# Altium PCB Vertigo Core.PcbDoc (part 2 of 2)
Units mm, origin at the board's own origin, x right, y up, seen from the top; angles counter-clockwise.
Board outline 68.33 x 88.9 mm, 4 copper layers (Power, Signal1, Signal 2, Ground); 94 components, 110 nets, 437 pads, 167 vias.
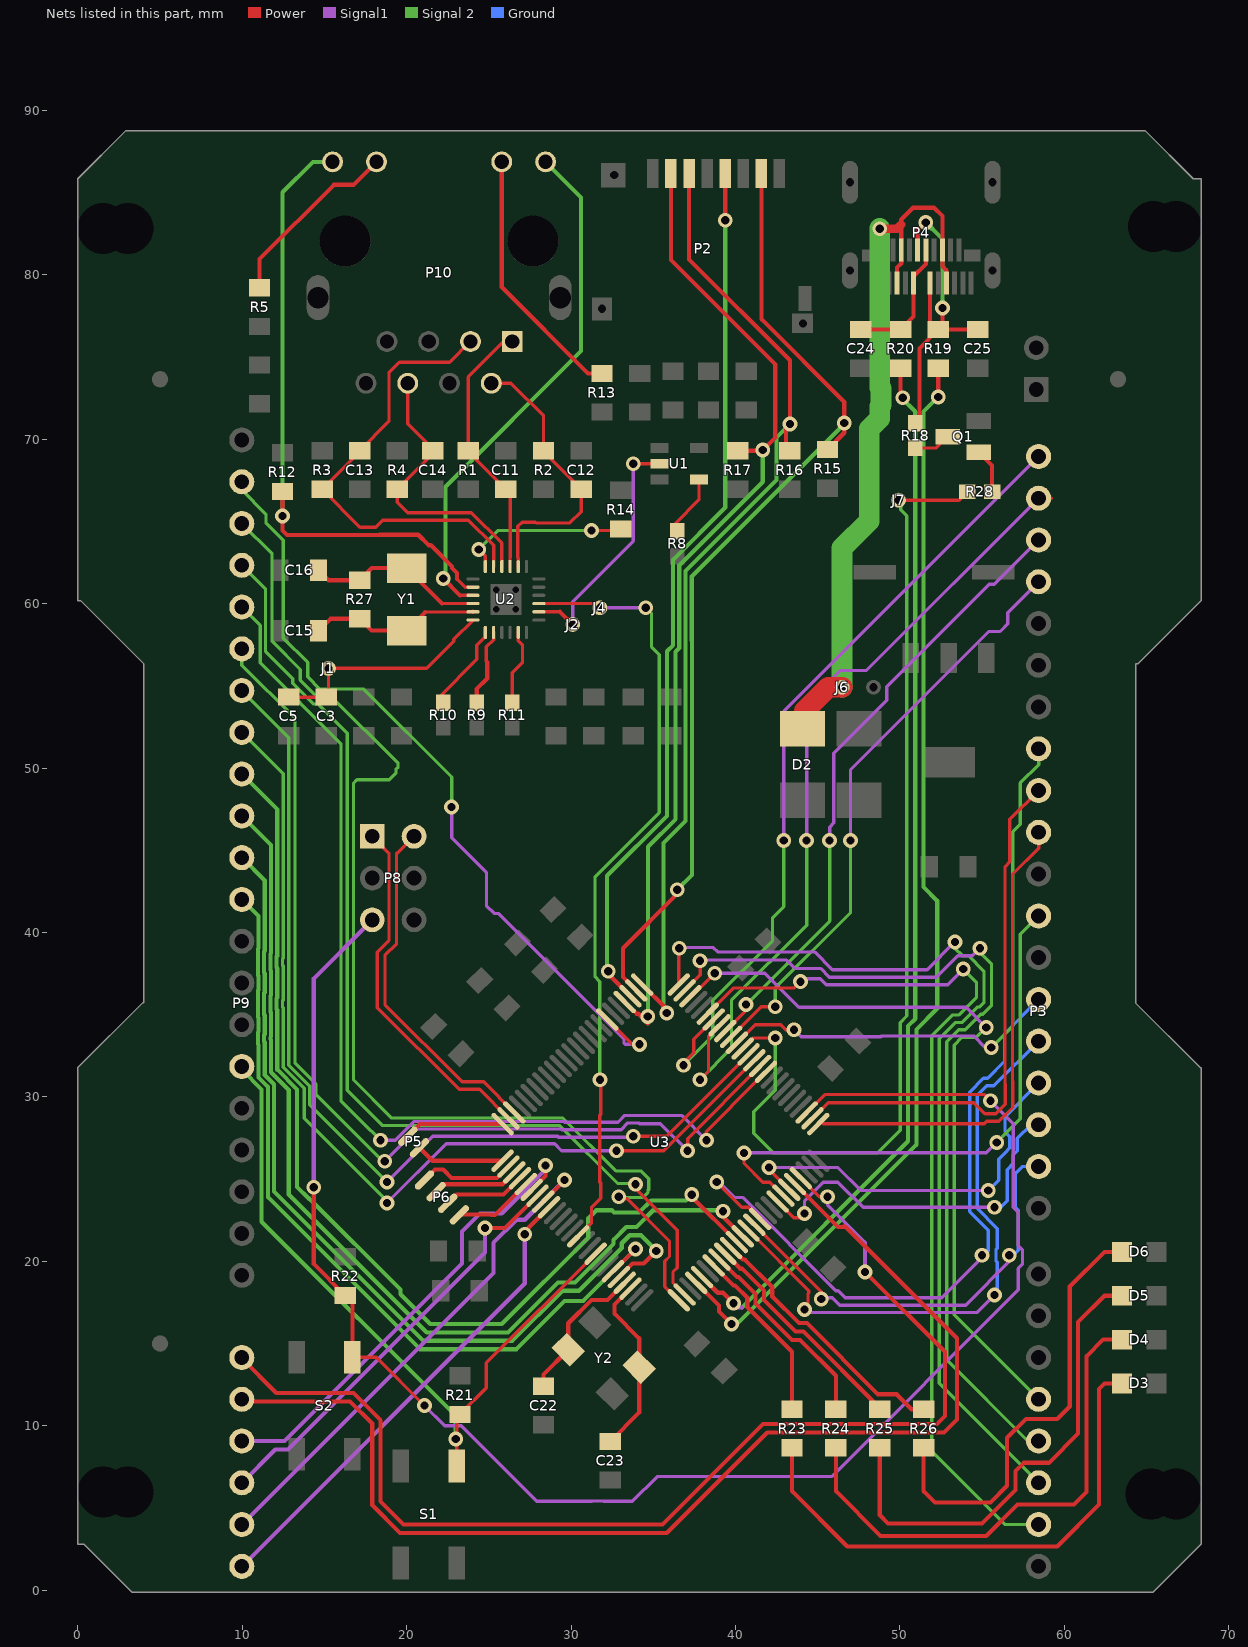
[diagram p4: the nets of this part, all layers, seen from the top]

## Via types
v1: diameter 0.9, hole 0.5, Power to Ground, tented both sides, 165 vias
v2: diameter 0.9, hole 0.5, Power to Ground, 2 vias

## Nets (pads, with @x,y where several pads share a name; then routed paths per layer and width w, separated by ;. In a path a pad name is that pad's centre, name@x,y a point inside that pad or via, vN(x,y) a via of type N, cw(c..) or ccw(c..) an arc to the next point about the centre after c; other vN are vias at no path point) (continued)
"ISP BOOT": P8.5 R22.1 S2.2 U3.53 | length 102.7
  Power w0.2: S2.2@16.7,14.166 18.146,14.166 v1(21.082,11.23) ; U3.53@44.325,29.053 44.366,29.053 45.466,30.153 55.118,30.153 v1(55.499,29.772)
  Power w0.254: v1(14.351,24.511) 14.351,19.834 R22.1@16.256,17.929 16.7,17.485 S2.2@16.7,14.166
  Signal1 w0.2: v1(21.082,11.23) 22.31,10.002 23.32,10.002 27.907,5.415 31.275,5.415 31.29,5.43 31.956,5.43 31.971,5.415 33.727,5.415 35.224,6.912 45.841,6.912 57.192,18.263 57.192,19.568 57.446,19.822 57.446,20.707 57.192,20.961 57.192,22.993 56.896,23.289 56.896,28.375 v1(55.499,29.772)
  Signal1 w0.254: v1(14.351,24.511) 14.351,37.211 P8.5@17.907,40.767
"JTAG RTCK": P5.1 U3.100 | length 6.1
  Power w0.254: P5.1@20.066,27.613 20.799,28.346 U3.100@25.834,28.346
"JTAG TCK": P6.4 U3.5 | length 4.8
  Power w0.254: P6.4@23.203,22.825 23.235,22.856 25.109,22.856 25.141,22.825 25.369,22.825 U3.5@27.248,24.704
"JTAG TD0": P5.2 U3.1 | length 5.4
  Power w0.254: P5.2@20.773,26.906 21.561,26.118 U3.1@25.834,26.118
"JTAG TDI": P6.1 U3.2 | length 5.9
  Power w0.254: P6.1@21.082,24.946 21.717,25.581 22.225,25.581 22.733,25.073 25.496,25.073 U3.2@26.188,25.765
"JTAG TMS": P6.2 U3.3 | length 4.6
  Power w0.254: P6.2@22.242,24.692 25.822,24.692 U3.3@26.541,25.411
"JTAG TRST": P6.3 U3.4 | length 5
  Power w0.254: P6.3@22.496,23.532 23.021,24.057 25.894,24.057 U3.4@26.895,25.058
LED1: R23.1 U3.32 | length 10.8
  Power w0.254: U3.32@38.668,19.754 39.884,18.538 39.968,18.538 40.709,17.797 40.709,17.229 43.434,14.504 R23.1@43.434,11.008
"LED1 REGOFF": P10.9 U2.3 | length 32.2
  Power w0.2: 23.245,60.502 U2.3@24.035,60.502
  Power w0.254: v1(22.225,61.522) 23.245,60.502
  Signal 2 w0.254: v1(22.225,61.522) 22.352,61.395 22.352,67.11 30.607,75.365 30.607,84.709 P10.9@28.448,86.868
LED2: R24.1 U3.33 | length 12.4
  Power w0.254: U3.33@39.022,20.108 40.083,19.046 40.179,19.046 41.217,18.008 41.217,17.439 43.431,15.225 43.916,15.225 46.101,13.04 R24.1@46.101,11.008
"LED2 NINTSEL": P10.12 R12.1 U2.2 | length 39.2
  Power w0.2: 23.056,61.501 23.555,61.002 U2.2@24.035,61.002
  Power w0.254: R12.1@12.446,66.824 v1(12.446,65.332) 12.446,64.443 12.718,64.171 18.314,64.171 18.332,64.189 20.701,64.189 21.336,63.554 21.463,63.554 22.758,62.259 22.758,62.164 23.056,61.866 23.056,61.501
  Signal 2 w0.254: v1(12.446,65.332) 12.446,85.017 14.297,86.868 P10.12@15.494,86.868
LED3: R25.1 U3.34 | length 13.7
  Power w0.254: U3.34@39.375,20.461 40.283,19.554 40.389,19.554 41.725,18.218 41.725,17.649 43.641,15.733 44.126,15.733 48.768,11.091 R25.1@48.768,11.008
LED4: R26.1 U3.35 | length 16.1
  Power w0.254: U3.35@39.729,20.815 40.436,20.107 40.554,20.107 42.233,18.428 42.233,17.86 43.852,16.241 44.337,16.241 48.664,11.914 49.803,11.914 50.709,11.008 R26.1@51.435,11.008
MISO1: P9.6 U3.61 | length 61.9
  Power w0.203: v1(37.084,26.724) 37.084,27.469 U3.61@41.496,31.881
  Signal1 w0.2: v1(18.669,26.089) 20.635,28.055 29.368,28.055 29.417,28.006 33.038,28.006 33.449,28.417 34.115,28.417 34.157,28.375 35.433,28.375 v1(37.084,26.724)
  Signal 2 w0.2: 18.081,26.553 18.546,26.089 v1(18.669,26.089)
  Signal 2 w0.203: P9.6@9.973,57.251 9.973,56.251 13.208,53.016 13.208,32.058 14.478,30.788 14.478,30.157 18.081,26.553
MOSI1: P9.5 U3.60 | length 62.7
  Power w0.203: v1(38.227,27.359) 38.227,27.867 39.751,29.391 39.751,29.429 U3.60@41.85,31.528
  Signal1 w0.2: v1(18.415,27.359) 19.297,27.359 20.447,28.509 29.556,28.509 29.605,28.46 32.85,28.46 33.261,28.871 36.715,28.871 v1(38.227,27.359)
  Signal 2 w0.2: 17.272,28.502 v1(18.415,27.359)
  Signal 2 w0.203: P9.5@9.973,59.791 11.091,58.673 11.091,56.4 16.002,51.489 16.002,29.772 17.272,28.502
NetC3_1: C3.1 C5.1 J1.1 U2.6 | length 14.2
  Power w0.203: C5.1@12.827,54.315 C3.1@15.113,54.315 15.24,54.442 J1.1@15.24,56.061 21.209,56.061 22.86,57.712 22.86,57.827 U2.6@24.035,59.002
NetC15_2: C15.2 R27.2 U2.5 Y1.1 | length 10.5
  Power w0.2: 21.132,59.494 U2.5@24.027,59.494
  Power w0.254: C15.2@14.637,58.347 15.367,59.077 R27.2@17.145,59.077 17.864,58.358 Y1.1@19.996,58.358 21.132,59.494 ; U2.5@24.027,59.494 U2.5@24.035,59.502
NetC16_2: C16.2 R27.1 U2.4 Y1.2 | length 10.8
  Power w0.2: 22.152,60.002 U2.4@24.035,60.002
  Power w0.254: C16.2@14.637,62.03 15.24,61.427 R27.1@17.145,61.427 17.876,62.158 Y1.2@19.996,62.158 22.152,60.002
NetC22_2: C22.2 U3.22 Y2.2 | length 9.2
  Power w0.254: C22.2@28.57,12.405 C22.2@28.321,12.405 28.321,13.121 Y2.2@29.825,14.625 29.825,16.236 31.242,17.653 32.218,17.653 U3.22@33.259,18.694
NetC23_2: C23.2 U3.23 Y2.1 | length 11
  Power w0.254: C23.2@32.385,9.049 34.138,10.802 Y2.1@34.138,13.564 34.138,15.319 32.639,16.818 32.639,17.367 U3.23@33.612,18.34
NetD3_1: D3.1 R23.2 | length 32.3
  Power w0.254: R23.2@43.434,8.658 43.434,6.023 46.79,2.667 59.563,2.667 62.103,5.207 62.103,12.246 62.43,12.573 D3.1@63.5,12.573
NetD4_1: D4.1 R24.2 | length 30.9
  Power w0.254: R24.2@46.101,8.658 46.101,6.023 48.822,3.302 55.245,3.302 57.15,5.207 60.579,5.207 61.341,5.969 61.341,14.224 62.357,15.24 D4.1@63.5,15.24
NetD5_1: D5.1 R25.2 | length 29.4
  Power w0.254: R25.2@48.768,8.658 48.768,4.572 49.276,4.064 54.991,4.064 57.023,6.096 57.023,7.239 57.531,7.747 59.055,7.747 60.833,9.525 60.833,16.31 62.43,17.907 D5.1@63.5,17.907
NetD6_1: D6.1 R26.2 | length 27.3
  Power w0.254: R26.2@51.435,8.658 51.435,6.023 52.124,5.334 55.499,5.334 56.515,6.35 56.515,9.271 57.658,10.414 59.563,10.414 60.325,11.176 60.325,18.469 62.43,20.574 D6.1@63.5,20.574
NetJ2_1: J2.1 U1.2 U2.14 | length 15.3
  Power w0.2: U2.14@28.035,59.502 29.325,59.502
  Power w0.203: v1(33.782,68.507) U1.2@35.376,68.507
  Power w0.254: 29.325,59.502 J2.1@30.099,58.728
  Signal1 w0.203: J2.1@30.099,58.728 30.099,60.125 33.782,63.808 v1(33.782,68.507)
NetP10_10: P10.10 R13.2 | length 15.9
  Power w0.254: P10.10@25.781,86.868 25.781,79.248 31.029,74 R13.2@31.877,74
NetP10_11: P10.11 R5.2 | length 11.3
  Power w0.254: R5.2@11.049,79.207 11.049,80.953 15.567,85.471 16.764,85.471 P10.11@18.161,86.868
NetQ1_1: Q1.3 R18.1 | length 2.3
  Power w0.2: R18.1@50.927,69.469 52.209,69.469 Q1.3@52.898,70.158
NetQ1_2: Q1.1 R28.2 | length 2.7
  Power w0.254: Q1.1@54.798,69.208 55.602,68.404 R28.2@55.602,66.802
NetR8_1: R8.1 U1.4 | length 3.4
  Power w0.203: R8.1@36.322,64.856 37.776,66.31 U1.4@37.776,67.557 ; R8.1@36.449,64.389 R8.1@36.449,64.516
NetR9_1: R9.1 U2.8 | length 4.7
  Power w0.203: 24.9,56.438 24.848,56.489 24.848,57.371 25.285,57.808 U2.8@25.285,58.252
  Power w0.254: R9.1@24.257,53.975 24.257,54.803 24.9,55.445 24.9,56.438
NetR10_1: R10.1 U2.7 | length 5.1
  Power w0.203: R10.1@21.971,54.315 24.264,56.608 24.264,57.473 24.785,57.994 U2.7@24.785,58.252
NetR11_1: R11.1 U2.11 | length 4.6
  Power w0.203: R11.1@26.416,53.975 26.416,55.799 27.044,56.427 27.044,57.473 26.785,57.732 U2.11@26.785,58.252
NetR14_2: R14.2 U2.24 | length 10.4
  Power w0.203: v1(24.384,63.3) 24.785,62.899 U2.24@24.785,62.252 ; v1(31.242,64.443) 32.925,64.443 R14.2@33.02,64.538
  Signal 2 w0.203: v1(24.384,63.3) 25.527,64.443 v1(31.242,64.443)
P1.22: P9.9 U3.36 | length 62.3
  Power w0.254: v1(37.338,24.057) 37.338,23.913 U3.36@40.082,21.169
  Signal 2 w0.254: P9.9@9.973,49.631 12.132,47.472 12.132,38.577 12.09,38.535 12.09,37.867 12.132,37.825 12.132,36.037 12.09,35.995 12.09,35.327 12.132,35.285 12.132,31.656 13.335,30.453 13.335,24.531 14.059,23.807 14.093,23.807 19.616,18.284 19.616,17.998 21.431,16.183 25.781,16.183 31.046,21.448 31.046,22.623 31.533,23.11 32.475,23.11 32.613,22.972 34.139,22.972 34.87,23.703 36.984,23.703 v1(37.338,24.057)
P1.23: P9.10 U3.37 | length 59.5
  Power w0.254: v1(39.243,23.041) 39.243,22.715 U3.37@40.436,21.522
  Signal 2 w0.254: P9.10@9.973,47.091 11.751,45.313 11.751,38.735 11.709,38.693 11.709,37.709 11.751,37.667 11.751,36.195 11.709,36.153 11.709,35.169 11.751,35.127 11.751,33.655 11.709,33.613 11.709,33.519 11.751,33.478 11.751,31.498 12.827,30.422 12.827,24.068 21.22,15.675 26.162,15.675 29.21,18.723 30.226,18.723 32.57,21.067 32.57,21.31 33.354,22.094 33.98,22.094 34.996,23.11 39.174,23.11 v1(39.243,23.041)
P1.30: P9.11 U3.21 | length 54.4
  Power w0.254: U3.21@32.905,19.047 33.724,19.866 34.417,19.866 v1(35.179,20.628)
  Signal 2 w0.254: P9.11@9.973,44.551 11.37,43.154 11.37,38.892 11.328,38.851 11.328,37.551 11.37,37.51 11.37,36.352 11.328,36.311 11.328,35.011 11.37,34.97 11.37,33.812 11.328,33.771 11.328,33.362 11.37,33.32 11.37,31.341 11.938,30.773 11.938,24.239 21.01,15.167 26.416,15.167 29.464,18.215 30.48,18.215 33.078,20.813 33.078,21.099 33.565,21.586 34.253,21.586 35.179,20.66 v1(35.179,20.628)
P1.31: P9.12 U3.20 | length 49.5
  Power w0.254: U3.20@32.552,19.401 33.906,20.755 v1(33.909,20.755)
  Signal 2 w0.254: P9.12@9.973,42.011 10.989,40.995 10.989,39.05 10.947,39.009 10.947,37.393 10.989,37.352 10.989,36.51 10.947,36.469 10.947,34.853 10.989,34.812 10.989,33.97 10.947,33.929 10.947,33.204 10.989,33.162 10.989,31.183 11.557,30.615 11.557,23.902 20.8,14.659 26.67,14.659 29.591,17.58 30.734,17.58 v1(33.909,20.755)
P2.6: P3.52 U3.67 | length 38
  Power w0.2: U3.67@39.375,34.003 40.64,35.267 v1(40.64,35.614)
  Signal1 w0.2: v1(45.72,45.593) 45.72,46.409 45.974,46.663 45.974,50.897 49.191,54.114 49.191,54.954 55.42,61.183 55.745,61.183 P3.52@58.433,63.871
  Signal 2 w0.2: v1(40.64,35.614) 45.72,40.694 v1(45.72,45.593)
P2.7: P3.51 U3.66 | length 36.3
  Power w0.2: U3.66@39.729,33.649 41.567,35.487 v1(42.418,35.487)
  Signal1 w0.2: v1(46.99,45.593) 46.99,49.888 55.407,58.305 56.086,58.305 56.557,58.776 56.557,59.455 P3.51@58.433,61.331
  Signal 2 w0.2: v1(42.418,35.487) 42.418,36.63 46.99,41.202 v1(46.99,45.593)
P2.9: J7.1 R28.1 U3.64 | length 61.5
  Power w0.2: U3.64@40.436,32.942 41.076,33.582 v1(42.418,33.582) ; J7.1@49.911,66.294 53.594,66.294 R28.1@54.102,66.802
  Signal 2 w0.2: v1(42.418,33.582) 42.418,30.407 41.106,29.095 41.106,27.782 42.291,26.597 48.641,26.597 50.012,27.968 50.012,34.514 50.419,34.921 50.419,65.332 50.038,65.713 J7.1@50.038,66.167
PLAY: P3.45 U3.51 | length 29.3
  Power w0.2: 45.339,28.375 55.132,28.375 55.271,28.514 56.02,28.514 56.863,29.357 56.863,30.962 56.842,30.983 56.842,43.538 58.433,45.129 P3.45@58.433,46.091
PLAY_LED: P9.2 U3.82 | length 49.1
  Power w0.2: U3.82@32.198,34.71 33.707,33.201 34.163,33.201 v1(34.163,33.197)
  Signal1 w0.2: v1(22.733,47.625) 22.733,45.768 24.85,43.651 24.85,41.631 25.321,41.16 25.57,41.16 33.22,33.51 33.22,33.261 33.28,33.201 34.163,33.201 v1(34.163,33.197)
  Signal 2 w0.2: P9.2@9.973,67.411 9.973,66.916 11.442,65.447 11.442,64.916 12.5,63.858 12.5,57.905 13.982,56.423 13.982,55.54 14.719,54.803 17.387,54.803 22.733,49.457 v1(22.733,47.625)
"POT SCI": P9.22 U3.47 | length 71
  Power w0.2: U3.47@43.971,25.058 45.099,23.93 v1(45.593,23.93)
  Power w0.254: P9.22@9.973,14.151 9.973,14.084 12.065,11.992 16.764,11.992 18.415,10.341 18.415,5.388 19.812,3.991 35.56,3.991 41.671,10.102 52.243,10.102 52.736,10.595 52.736,14.501 v1(47.879,19.358)
  Signal1 w0.2: v1(45.593,23.93) 45.593,23.422 47.879,21.136
  Signal1 w0.254: v1(47.879,19.358) 47.879,21.136
"POT SDA": P9.23 U3.46 | length 71.4
  Power w0.254: P9.23@9.973,11.611 10.1,11.484 16.554,11.484 17.907,10.131 17.907,5.178 19.602,3.483 35.814,3.483 41.925,9.594 52.676,9.594 53.467,10.385 53.467,15.326 46.699,22.094 46.667,22.094 ; U3.46@43.618,24.704 46.228,22.094 46.667,22.094 ; 46.609,22.152 46.667,22.094
PWM0: P3.54 U3.69 | length 49.9
  Power w0.2: v1(36.83,31.931) 36.83,32.058 37.465,32.693 37.465,33.507 U3.69@38.668,34.71
  Signal1 w0.2: v1(42.926,45.593) 42.926,53.444 P3.54@58.433,68.951 P3.54@58.864,68.951
  Signal 2 w0.2: v1(36.83,31.931) 38.608,33.709 38.608,35.868 42.249,39.509 42.249,40.9 42.926,41.577 v1(42.926,45.593)
PWM1: P3.53 U3.68 | length 49.4
  Power w0.2: v1(37.846,31.042) 38.354,31.55 38.354,33.689 U3.68@39.022,34.356 ; P3.53@58.433,66.411 59.204,66.411
  Signal1 w0.2: v1(44.323,45.593) 44.323,53.896 46.361,55.934 47.956,55.934 P3.53@58.433,66.411
  Signal 2 w0.2: v1(37.846,31.042) 39.751,32.947 39.751,35.868 44.323,40.44 v1(44.323,45.593)
RESET: P9.16 R21.1 S1.2 U3.17 | length 44.6
  Power w0.203: S1.2@23.05,7.562 23.05,10.499 R21.1@23.241,10.69 24.848,12.297 24.848,13.819 U3.17@31.491,20.461
  Signal1 w0.254: P9.16@9.973,31.851 P9.16@10.053,31.931
  Signal 2 w0.254: P9.16@9.973,31.851 9.973,31.66 11.176,30.457 11.176,22.406 22.987,10.595 v1(22.987,9.198)
RSTOUT: J4.1 U2.15 U3.14 | length 47.5
  Power w0.2: U2.15@28.035,60.002 J4.1@31.492,60.002
  Power w0.203: U3.14@30.43,21.522 31.242,22.334 31.242,23.295 31.794,23.847 31.794,24.772 31.75,24.815 31.75,28.887 31.794,28.93 31.794,30.998 v1(31.75,31.042)
  Power w0.254: J4.1@31.492,60.002 J4.1@31.75,59.744
  Signal1 w0.203: J4.1@31.75,59.744 v1(34.544,59.744)
  Signal 2 w0.203: v1(31.75,31.042) 31.75,37.015 31.452,37.312 31.452,43.397 35.35,47.294 35.35,56.903 34.892,57.36 34.892,59.396 v1(34.544,59.744)
RX0: P8.1 U3.99 | length 21.9
  Power w0.203: P8.1@17.907,45.847 18.923,44.831 18.923,39.509 18.219,38.804 18.219,35.429 23.19,30.458 24.429,30.458 U3.99@26.188,28.699
RX+: C13.1 P10.3 R3.1 U2.23 | length 28
  Power w0.203: P10.3@23.876,75.946 22.606,74.676 19.558,74.676 18.923,74.041 18.923,71.079 C13.1@17.145,69.301 17.145,69.237 R3.1@14.859,66.951 17.157,64.653 18.114,64.653 18.538,65.078 23.749,65.078 25.285,63.542 U2.23@25.285,62.252
RX-: C14.1 P10.6 R4.1 U2.22 | length 17.6
  Power w0.203: P10.6@20.066,73.406 20.066,70.937 21.59,69.413 C14.1@21.59,69.301 21.59,69.11 R4.1@19.431,66.951 19.431,66.17 20.066,65.535 23.938,65.535 25.785,63.689 U2.22@25.785,62.252
SCK1: P9.8 U3.62 | length 58.6
  Power w0.203: v1(32.766,26.724) 35.632,26.724 U3.62@41.143,32.235
  Signal1 w0.2: v1(18.796,23.549) 22.394,27.147 28.991,27.147 29.414,26.724 v1(32.766,26.724)
  Signal 2 w0.2: 18.462,24.013 18.796,23.68 v1(18.796,23.549)
  Signal 2 w0.203: P9.8@9.973,52.171 12.488,49.656 12.488,38.429 12.446,38.388 12.446,38.014 12.488,37.973 12.488,35.889 12.446,35.848 12.446,35.474 12.488,35.433 12.488,31.803 13.767,30.524 13.767,28.709 18.462,24.013
"SD CD": P3.46 U3.52 | length 32.6
  Power w0.2: U3.52@44.678,28.699 45.624,29.645 54.489,29.645 55.166,28.968 55.832,28.968 56.409,29.545 56.409,30.774 56.388,30.795 56.388,44.002 56.684,44.298 56.684,46.882 P3.46@58.433,48.631
"SD CS": P2.2 R17.1 U3.79 | length 61.8
  Power w0.254: U3.79@33.259,35.77 33.966,35.063 34.079,35.063 34.66,34.482 v1(34.66,34.894) ; P2.2@36.072,86.16 36.072,80.895 42.418,74.549 42.418,70.104 v1(41.656,69.342) 41.615,69.301 R17.1@40.132,69.301
  Signal 2 w0.254: v1(34.66,34.894) 34.66,34.482 34.671,34.471 34.671,45.215 36.34,46.884 36.34,57.072 36.576,57.308 36.576,62.328 41.656,67.408 v1(41.656,69.342)
"SD IRQ": P9.4 U3.27 | length 62.8
  Power w0.2: v1(33.909,24.692) 33.909,24.438 36.449,21.898 36.449,19.612 36.195,19.358 36.195,18.692 U3.27@36.9,17.987
  Signal 2 w0.2: P9.4@9.973,62.331 11.419,60.885 11.419,57.088 13.074,55.433 13.074,55.164 14.343,53.895 14.612,53.895 16.383,52.124 16.383,30.407 18.53,28.26 29.318,28.26 32.844,24.734 33.867,24.734 v1(33.909,24.692)
"SD MISO": P2.7 R15.1 U3.77 | length 59.8
  Power w0.254: U3.77@33.966,36.477 33.147,37.296 33.147,39.043 36.449,42.345 v1(36.449,42.599) ; P2.7@41.572,86.16 41.572,77.3 46.609,72.263 v1(46.609,70.993) 46.609,70.39 R15.1@45.593,69.374
  Signal 2 w0.254: v1(36.449,42.599) 37.356,43.506 37.356,57.734 37.338,57.752 37.338,61.653 46.609,70.924 v1(46.609,70.993) v1@46.609,71.047
"SD MOSI": P2.3 R16.1 U3.76 | length 61
  Power w0.254: U3.76@34.319,36.831 35.814,35.336 v1(35.814,35.106) ; P2.3@37.172,86.16 37.172,80.938 43.307,74.803 v1(43.307,70.92) 43.307,70.907 43.066,70.666 43.066,69.542 R16.1@43.307,69.301
  Signal1 w0.254: v1@35.618,35.302 v1(35.814,35.106)
  Signal 2 w0.254: v1@35.618,35.302 35.618,45.443 36.957,46.782 36.957,61.99 42.487,67.52 42.487,70.1 v1(43.307,70.92)
"SD SCK": P2.5 U3.78 | length 53.7
  Power w0.254: v1(32.258,37.646) 32.258,37.478 U3.78@33.612,36.124 ; P2.5@39.37,86.162 P2.5@39.372,86.16 v1(39.372,83.314)
  Signal1 w0.254: v1@32.131,37.646 v1(32.258,37.646)
  Signal 2 w0.254: v1(32.258,37.646) 32.189,37.715 32.189,43.451 35.832,47.094 35.832,57.103 36.195,57.465 36.195,62.665 39.372,65.842 v1(39.372,83.314)
"SD WP": P9.3 U3.26 | length 72.4
  Power w0.2: v1(32.893,23.93) 32.766,23.803 33.401,23.803 35.983,21.221 35.983,20.295 35.687,19.999 35.687,18.469 36.523,17.633 U3.26@36.547,17.633
  Signal 2 w0.2: P9.3@9.973,64.871 11.811,63.033 11.811,57.711 13.528,55.994 13.528,55.352 14.531,54.349 15.422,54.349 19.473,50.298 19.473,50.05 19.346,49.923 19.346,49.685 18.949,49.288 16.976,49.288 16.764,49.076 16.764,31.042 19.092,28.714 29.506,28.714 32.724,25.496 34.242,25.496 34.713,25.025 34.713,24.359 34.671,24.317 34.671,24.184 34.375,23.888 32.851,23.888 v1(32.893,23.93)
SSEL1: P9.7 U3.63 | length 59
  Power w0.203: v1(33.782,27.613) 35.814,27.613 U3.63@40.789,32.588
  Signal1 w0.2: v1(18.796,24.819) 21.578,27.601 29.179,27.601 29.228,27.552 33.721,27.552 v1(33.782,27.613)
  Signal 2 w0.2: 18.335,25.283 v1@18.796,24.823 ; v1(18.796,24.819) v1@18.796,24.823 ; v1@18.796,24.946 v1@18.796,24.823
  Signal 2 w0.203: P9.7@9.973,54.711 12.827,51.857 12.827,31.931 14.097,30.661 14.097,29.522 18.335,25.283 ; v1@33.699,27.53 v1(33.782,27.613)
STP1: P3.30 U3.75 | length 58
  Power w0.2: U3.75@36.547,36.831 36.547,39.014 v1(36.576,39.043)
  Signal1 w0.2: v1(36.576,39.043) 36.618,39.085 38.653,39.085 38.918,38.82 44.806,38.82 45.895,37.731 51.647,37.731 v1(53.34,39.424)
  Signal 2 w0.2: v1(53.34,39.424) 53.34,39.043 53.806,38.577 54.181,38.577 55.106,37.652 55.106,35.728 54.853,35.475 54.724,35.475 53.781,34.532 53.393,34.532 52.39,33.529 52.39,12.574 P3.30@58.433,6.531
STP2: P3.31 U3.74 | length 54.8
  Power w0.2: U3.74@36.9,36.477 37.846,37.423 v1(37.846,38.281)
  Signal1 w0.2: v1(37.846,38.281) 37.888,38.323 43.101,38.323 43.609,37.815 45.169,37.815 45.707,37.277 52.215,37.277 53.515,38.577 54.398,38.577 v1(54.864,39.043)
  Signal 2 w0.2: v1(54.864,39.043) 54.864,38.789 55.56,38.093 55.56,35.54 55.041,35.021 54.912,35.021 53.969,34.078 53.581,34.078 52.844,33.341 52.844,14.012 57.785,9.071 P3.31@58.433,9.071
STP3: P3.32 U3.73 | length 46
  Power w0.2: U3.73@37.254,36.124 37.34,36.124 v1(38.735,37.519)
  Signal1 w0.2: v1(38.735,37.519) 41.783,37.519 43.857,35.445 54.017,35.445 v1(55.245,34.217)
  Signal 2 w0.2: v1(55.245,34.217) 54.652,33.624 53.769,33.624 53.298,33.153 53.298,16.746 P3.32@58.433,11.611
STP4: P3.29 U3.70 | length 56.3
  Power w0.2: U3.70@38.314,35.063 39.881,36.63 43.561,36.63 v1(43.942,37.011)
  Signal1 w0.2: v1(43.942,37.011) 44.111,37.18 45.162,37.18 45.519,36.823 52.898,36.823 v1(53.848,37.773)
  Signal 2 w0.2: v1(53.848,37.773) 54.652,36.969 54.652,36.045 53.593,34.986 53.205,34.986 51.936,33.717 51.936,8.443 56.388,3.991 P3.29@58.433,3.991
STP5: P3.47 U3.65 | length 35.9
  Power w0.2: U3.65@40.082,33.295 40.099,33.295 41.19,34.386 42.751,34.386 43.047,34.09 v1(43.561,34.09)
  Signal1 w0.2: v1(43.561,34.09) 43.984,33.667 48.847,33.667 48.889,33.709 54.483,33.709 55.191,33.001 v1(55.553,33.001)
  Signal 2 w0.2: v1(55.553,33.001) 56.863,34.311 56.863,46.122 57.317,46.576 57.317,49.093 58.433,50.209 P3.47@58.433,51.171
TH1: P9.27 U3.9 | length 29.6
  Power w0.254: v1(27.178,21.644) 27.178,21.805 U3.9@28.662,23.29
  Signal1 w0.254: P9.27@9.973,1.451 27.178,18.656 v1(27.178,21.644)
TH2: P9.26 U3.8 | length 31.2
  Power w0.254: U3.8@28.309,23.643 29.591,24.926 v1(29.591,24.946)
  Signal1 w0.254: P9.26@9.973,3.991 25.273,19.291 25.273,21.136 26.67,22.533 27.178,22.533 v1(29.591,24.946)
TH3: P9.25 U3.7 | length 26.1
  Power w0.254: v1(24.765,22.025) 25.983,22.025 U3.7@27.955,23.997
  Signal1 w0.254: P9.25@9.973,6.531 12.005,8.563 12.783,8.563 24.765,20.545 v1(24.765,22.025)
TH4: P9.24 U3.6 | length 28.5
  Power w0.254: U3.6@27.602,24.351 28.448,25.197 v1(28.448,25.835)
  Signal1 w0.254: P9.24@9.973,9.071 12.573,9.071 23.368,19.866 23.368,21.815 24.467,22.914 25.781,22.914 28.448,25.581 v1(28.448,25.835)
TX0: P8.2 U3.98 | length 21.6
  Power w0.203: P8.2@20.447,45.847 19.431,44.831 19.38,44.831 19.38,39.319 18.676,38.615 18.676,35.619 23.38,30.915 24.7,30.915 25.603,30.012 25.603,29.991 U3.98@26.541,29.053
TX+: C11.1 P10.1 R1.1 U2.21 | length 16.3
  Power w0.203: U2.21@26.285,62.252 26.285,62.78 ; 26.289,62.919 26.285,62.915 26.285,62.78 ; P10.1@26.416,75.946 25.908,75.946 23.749,73.787 R1.1@23.749,69.301 23.749,69.237 C11.1@26.035,66.951 26.306,66.68 26.306,62.801 26.285,62.78
TX-: C12.1 P10.2 R2.1 U2.20 | length 17.7
  Power w0.203: P10.2@25.146,73.406 26.343,73.406 28.321,71.428 R2.1@28.321,69.301 28.321,69.237 C12.1@30.607,66.951 ; U2.20@26.785,62.252 26.785,62.78 26.764,62.801 26.764,64.697 27.018,64.951 27.817,64.951 27.86,64.907 29.928,64.907 30.607,65.586 C12.1@30.607,66.951 ; C12.1@30.48,66.824 C12.1@30.607,66.951
"USB D+": R19.1 U3.29 | length 67.6
  Power w0.254: U3.29@37.607,18.694 38.989,17.312 38.989,16.945 v1(39.751,16.183) ; v1(52.324,72.571) R19.1@52.324,74.317
  Signal1 w0.254: v1(39.751,16.183) v1@40.088,16.183
  Signal 2 w0.254: v1@40.088,16.183 51.001,27.096 51.001,34.104 52.266,35.369 52.266,41.927 51.435,42.758 51.435,71.682 v1(52.324,72.571)
"USB D-": R20.1 U3.30 | length 65.2
  Power w0.254: U3.30@37.961,19.047 38.92,18.088 39.243,18.088 v1(39.878,17.453) ; R20.1@50.038,74.317 50.038,72.571 50.092,72.517 v1(50.165,72.517)
  Signal1 w0.254: v1(39.878,17.453) 40.132,17.199 40.386,17.199
  Signal 2 w0.254: 40.386,17.199 50.493,27.306 50.493,34.315 50.927,34.749 50.927,71.682 50.092,72.517 v1(50.165,72.517)
USB+: C25.1 P4.6 P4.18 R18.2 R19.2 | length 21.8
  Power w0.254: R18.2@50.927,70.969 51.181,71.223 51.181,75.524 R19.2@52.324,76.667 ; P4.18@51.076,81.169 P4.18@51.076,81.514 51.076,82.699 v2(51.562,83.185) ; P4.6@51.826,79.864 P4.6@51.826,79.514 51.826,77.165 R19.2@52.324,76.667 ; R19.2@51.911,76.667 R19.2@52.324,76.667 ; v2(52.578,77.978) 52.578,76.921 R19.2@52.324,76.667 ; C25.1@54.737,76.667 R19.2@52.324,76.667
  Signal 2 w0.254: 51.943,82.804 52.578,82.169 v2(52.578,77.978)
  Signal 2 w0.305: v2(51.562,83.185) 51.943,82.804
USB-: C24.1 P4.7 P4.19 R20.2 | length 8
  Power w0.254: C24.1@47.625,76.667 R20.2@50.038,76.667 ; R20.2@50.451,76.667 R20.2@50.038,76.667 ; P4.19@51.576,81.169 51.576,80.659 50.826,79.909 50.826,79.864 50.826,77.455 R20.2@50.038,76.667
"V USB": D2.1 J6.1 P4.4 P4.9 P4.16 P4.21 | length 44.7
  Power w0.254: P4.9@49.826,79.864 49.826,80.433 50.076,80.683 50.076,83.058 50.076,83.35 50.8,84.074 52.07,84.074 52.576,83.568 52.576,80.52 52.826,80.27 P4.4@52.826,79.864
  Power w0.508: v1(48.768,82.804) 49.822,82.804 50.076,83.058
  Power w1.27: D2.1@44.069,52.401 44.196,52.528 44.196,53.467 45.647,54.918 J6.1@46.482,54.918
  Signal 2 w1.27: J6.1@46.482,54.918 46.482,63.373 48.133,65.024 48.133,70.612 48.768,71.247 48.768,72 48.837,72.069 48.837,73.073 48.768,73.142 v1(48.768,82.804)
"X MAX": P3.37 U3.39 | length 26.6
  Power w0.2: U3.39@41.143,22.229 45.212,18.16 v1(45.212,17.707)
  Signal1 w0.2: v1(45.212,17.707) 45.285,17.78 45.894,17.78 46.336,17.338 53.993,17.338 56.769,20.114 56.769,20.247 v1(56.642,20.374)
  Ground w0.2: v1(56.642,20.374) 56.769,20.247 57.192,20.67 57.192,23.12 57.023,23.289 57.023,25.381 57.084,25.381 57.474,25.771 P3.37@58.433,25.771
"X MIN": P3.40 U3.38 | length 36.4
  Power w0.2: U3.38@40.789,21.876 44.45,18.215 44.45,18.082 44.408,18.04 44.408,17.284 v1(44.196,17.072)
  Signal1 w0.2: v1(44.196,17.072) 44.384,16.884 54.676,16.884 v1(55.753,17.961)
  Ground w0.2: v1(55.753,17.961) 55.922,18.13 55.922,19.957 55.838,20.041 55.838,20.707 55.922,20.791 55.922,21.989 54.695,23.216 54.695,30.105 55.263,30.673 55.715,30.673 P3.40@58.433,33.391
"Y MAX": P3.38 U3.43 | length 22.3
  Power w0.2: U3.43@42.557,23.643 43.541,22.66 43.942,22.66 v1(44.196,22.914)
  Signal1 w0.2: v1(44.196,22.914) 44.196,23.676 45.339,24.819 46.228,24.819 47.752,23.295 v1(55.753,23.295)
  Ground w0.2: v1(55.753,23.295) 56.128,23.295 56.515,23.682 56.515,25.581 56.896,25.962 ; 56.896,25.835 56.896,25.962 ; P3.38@58.433,28.311 57.975,28.311 57.138,27.474 57.138,26.711 56.896,26.469 56.896,25.962
"Y MIN": P3.41 U3.40 | length 42.1
  Power w0.2: v1(38.862,24.819) 40.386,23.295 40.784,23.295 U3.40@41.496,22.583
  Signal1 w0.2: v1(38.862,24.819) 38.995,24.819 39.926,23.888 40.428,23.888 46.101,18.215 46.234,18.215 46.657,17.792 52.536,17.792 55.118,20.374 v1(54.991,20.374)
  Ground w0.2: v1(54.991,20.374) 55.118,20.374 55.372,20.628 55.372,21.897 54.241,23.028 54.241,30.293 55.075,31.127 55.324,31.127 56.357,32.16 56.357,33.855 P3.41@58.433,35.931
"Z MAX": P3.39 U3.45 | length 23.8
  Power w0.2: v1(42.037,25.708) 42.037,25.578 U3.45@43.264,24.351
  Signal1 w0.2: v1(42.037,25.708) 46.228,25.708 47.625,24.311 v1(55.372,24.311)
  Ground w0.2: v1(55.372,24.311) 56.007,24.946 56.007,26.216 56.388,26.597 56.388,26.603 56.684,26.899 56.684,27.565 56.388,27.861 56.388,28.806 P3.39@58.433,30.851
"Z MIN": P3.43 U3.44 | length 34.3
  Power w0.2: v1(40.513,26.597) 40.513,25.962 41.656,24.819 42.089,24.819 U3.44@42.911,23.997
  Signal1 w0.2: v1(40.513,26.597) 55.245,26.597 v1(55.88,27.232)
  Signal 2 w0.2: v1(55.88,27.232) 57.317,28.669 57.317,39.895 P3.43@58.433,41.011
pads on no net: ?.0 P2.1 P2.8 P3.36 P4.2 P4.3 P4.5 P4.8 P4.10 P4.11 P4.14 P4.15 P4.17 P4.20 P4.22 P4.23 P10.7 P10.13 P10.14 S1.0 S2.0 U1.1 U3.0 U3.13 U3.16 U3.18 U3.24 U3.25 Y2.0

## Polygon pours and split planes (outlines as drawn)
AGND on Ground "GND plane" (solid, remove dead copper, pour order 10): 3.302,-0.127 65.405,-0.127 68.326,2.794 68.326,31.623 64.262,35.687 64.262,56.261 68.326,60.325 68.326,85.344 64.897,88.773 2.921,88.773 0,85.852 0,60.325 4.064,56.261 4.064,35.687 0,31.623 0,3.175 3.302,-0.127
AGND on Power "GND plane" (solid, remove dead copper, pour order 8): 3.302,-0.127 65.405,-0.127 68.326,2.794 68.326,31.623 64.262,35.687 64.262,56.261 68.326,60.325 68.326,85.344 64.897,88.773 2.921,88.773 0,85.852 0,60.325 4.064,56.261 4.064,35.687 0,31.623 0,3.175 3.302,-0.127

## Silkscreen, mask and mechanical layers (free items; w line width, h text height)
Top Overlay:
  circle w0.254: c34.925,13.897 r0.127
  text "USB C" at 49.784,86.741 h0.73
  text "Ethernet" at 18.923,82.604 h0.73
  text "SD card" at 35.433,81.915 h0.73
  text "330" at 11.43,76.835 h1.52 r90
  text "33" at 52.699,75.221 h1.52 r90
  text "33" at 50.419,75.184 h1.52 r90
  text "18p" at 55.112,74.713 h1.52 r90
  text "18p" at 48.006,74.676 h1.52 r90
  text "1u" at 36.322,72.39 h1.52 r90
  text "-    +" at 60.706,72.136 h0.73 r90
  text "330" at 32.385,72.009 h1.52 r90
  text "100n" at 11.557,71.882 h1.52 r90
  text "100n" at 41.148,71.755 h1.52 r90
  text "100n" at 38.862,71.501 h1.52 r90
  text "100n" at 34.417,71.374 h1.52 r90
  text "EXT 5V DC in" at 61.595,70.231 h0.73 r90
  text "BSS84" at 53.467,69.723 h1.52
  text "EN5" at 6.731,69.342 h0.73
  text "1K5" at 51.435,69.215 h1.52 r90
  text "74LV" at 34.925,68.834 h1.52
  text "PWM0" at 59.69,68.58 h0.73
  text "C1G04" at 34.02,67.813 h1.52
  text "TP6" at 32.893,67.491 h0.73 r90
  text "18p" at 21.971,67.183 h1.52 r90
  text "49.9" at 24.13,67.183 h1.52 r90
  text "18p" at 26.289,67.183 h1.52 r90
  text "18p" at 31.115,67.183 h1.52 r90
  text "10K" at 43.942,67.183 h1.52 r90
  text "18p" at 17.653,67.056 h1.52 r90
  text "10K" at 40.767,67.056 h1.52 r90
  text "10K" at 46.101,67.056 h1.52 r90
  text "PLAY LED" at 3.048,66.929 h0.73
  text "10K" at 12.827,66.929 h1.52 r90
  text "49.9" at 28.702,66.929 h1.52 r90
  text "49.9" at 15.24,66.802 h1.52 r90
  text "49.9" at 19.812,66.802 h1.52 r90
  text "1K5" at 53.594,66.294 h1.52
  text "PWM1" at 59.69,66.04 h0.73
  text "TP" at 50.546,65.913 h0.73
  text "SD WP" at 5.334,64.262 h0.73
  text "12K1" at 33.528,64.262 h1.52 r90
  text "P2.6" at 59.69,63.627 h0.73
  text "22" at 36.83,62.738 h1.52 r90
  text "SD IRQ" at 4.699,61.976 h0.73
  text "18p" at 12.065,61.722 h1.52
  text "100uF" at 50.419,60.96 h1.52
  text "P2.7" at 59.69,60.96 h0.73
  text "TP5" at 31.242,60.506 h0.73
  text "LAN8720" at 23.622,59.69 h1.52
  text "MOSI1" at 5.715,59.436 h0.73
  text "1M" at 17.526,59.436 h1.52 r90
  text "EN3" at 59.69,58.293 h0.73
  text "18p" at 12.065,57.912 h1.52
  text "TP3" at 29.718,57.077 h0.73
  text "MISO1" at 5.715,56.896 h0.73
  text "TP4" at 15.875,56.569 h0.73
  text "TP3" at 45.339,56.188 h0.73
  text "TP2" at 47.625,56.188 h0.73
  text "EN2" at 59.69,55.88 h0.73
  text "SSEL1" at 5.588,54.229 h0.73
  text "EN1" at 59.69,53.213 h0.73
  text "LT1117" at 50.673,53.086 h1.52
  text "22" at 22.606,52.705 h1.52 r90
  text "22" at 24.638,52.705 h1.52 r90
  text "22" at 26.924,52.705 h1.52 r90
  text "FB" at 36.449,52.705 h1.52 r90
  text "1u" at 13.208,52.324 h1.52 r90
  text "10u" at 20.32,52.197 h1.52 r90
  text "10u" at 34.163,52.197 h1.52 r90
  text "SCK1" at 6.223,51.816 h0.73
  text "470p" at 15.367,51.562 h1.52 r90
  text "100n" at 17.78,51.562 h1.52 r90
  text "100n" at 31.877,51.562 h1.52 r90
  text "100n" at 29.464,51.435 h1.52 r90
  text "STP5" at 59.69,50.8 h0.73
  text "SS34" at 44.323,50.165 h1.52 r90
  text "SS34" at 47.752,50.165 h1.52 r90
  text "P1.22" at 5.588,49.276 h0.73
  text "TP1" at 54.864,48.314 h0.73
  text "SD CD" at 59.69,48.26 h0.73
  text "PROG" at 17.78,47.625 h0.72
  text "P1.23" at 5.588,46.736 h0.73
  text "RX0" at 14.224,45.593 h0.73
  text "TX0" at 22.098,45.593 h0.73
  text "PLAY" at 59.69,45.593 h0.73
  text "P1.30" at 5.588,44.196 h0.73
  text "100n" at 51.689,43.561 h1.52
  text "5V" at 22.352,43.053 h0.73
  text "DIR5" at 59.69,43.053 h0.73
  text "3.3V" at 13.462,42.926 h0.73
  text "P1.31" at 5.842,41.656 h0.73
  text "100n" at 28.448,41.275 h1.52 r315
  text "Z MIN" at 59.69,40.64 h0.73
  text "ISP" at 14.224,40.259 h0.73
  text "GND" at 22.352,40.259 h0.73
  text "10K" at 26.162,39.314 h1.52 r315
  text "AVCC" at 5.969,39.116 h0.73
  text "GND" at 59.817,38.1 h0.73
  text "100n" at 40.386,37.338 h1.52 r45
  text "75" at 34.798,37.265 h0.73
  text "10K" at 24.13,36.83 h1.52 r315
  text "GND" at 6.731,36.576 h0.73
  text "Y MIN" at 59.69,35.56 h0.73
  text "3.3V" at 6.223,34.036 h0.73
  text "100n" at 21.209,34.036 h1.52 r315
  text "X MIN" at 59.817,33.02 h0.73
  text "RESET" at 5.334,31.496 h0.73
  text "100n" at 45.847,31.242 h1.52 r45
  text "Z MAX" at 59.817,30.48 h0.73
  text "3.3V" at 6.223,28.956 h0.73
  text "Y MAX" at 59.69,27.94 h0.73
  text "50" at 45.212,26.851 h0.73
  text "5V" at 7.493,26.543 h0.73
  text "X MAX" at 59.817,25.4 h0.73
  text "GND" at 6.731,24.003 h0.73
  text "GND" at 6.731,21.336 h0.73
  text "100n" at 43.815,21.082 h1.52 r315
  text "100n" at 21.59,20.193 h1.52
  text "EN 4" at 6.096,18.796 h0.73
  text "DIR3" at 59.817,18.796 h0.73
  text "10K" at 16.637,17.907 h1.52 r90
  text "22uH" at 21.59,17.907 h1.52
  text "25" at 34.798,16.564 h0.73
  text "DIR2" at 59.817,16.256 h0.73
  text "100n" at 37.084,14.986 h1.52 r315
  text "DIR1" at 59.817,13.716 h0.73
  text "POT SCI" at 4.064,12.827 h0.73
  text "POT SDA" at 3.81,11.303 h0.73
  text "STP3" at 59.944,11.049 h0.73
  text "10K" at 23.622,10.795 h1.52 r90
  text "18p" at 28.559,10.287 h1.52 r90
  text "330" at 43.942,8.89 h1.52 r90
  text "330" at 46.482,8.89 h1.52 r90
  text "330" at 49.276,8.763 h1.52 r90
  text "TH4" at 6.731,8.636 h0.73
  text "330" at 51.943,8.636 h1.52 r90
  text "STP2" at 59.817,8.636 h0.73
  text "18p" at 32.639,7.239 h1.52 r90
  text "TH3" at 6.731,6.096 h0.73
  text "STP1" at 59.817,5.969 h0.73
  text "TH2" at 6.604,3.556 h0.73
  text "STP4" at 59.944,3.429 h0.73
  text "core 1.2" at 30.861,1.016 h1.52
  text "TH1" at 6.858,0.762 h0.73
  text "DIR4" at 59.944,0.762 h0.73
Bottom Overlay:
  drawing of 16345 lines, arcs and shapes, not listed